# Altium PCB SwipingCard_PCB.PcbDoc
Units mil, origin at the board's own origin, x right, y up, seen from the top; angles counter-clockwise.
Board outline 100.31 x 100.31 mil, 2 copper layers (Top Layer, Bottom Layer); 24 components, 18 nets, 156 pads, 0 vias.
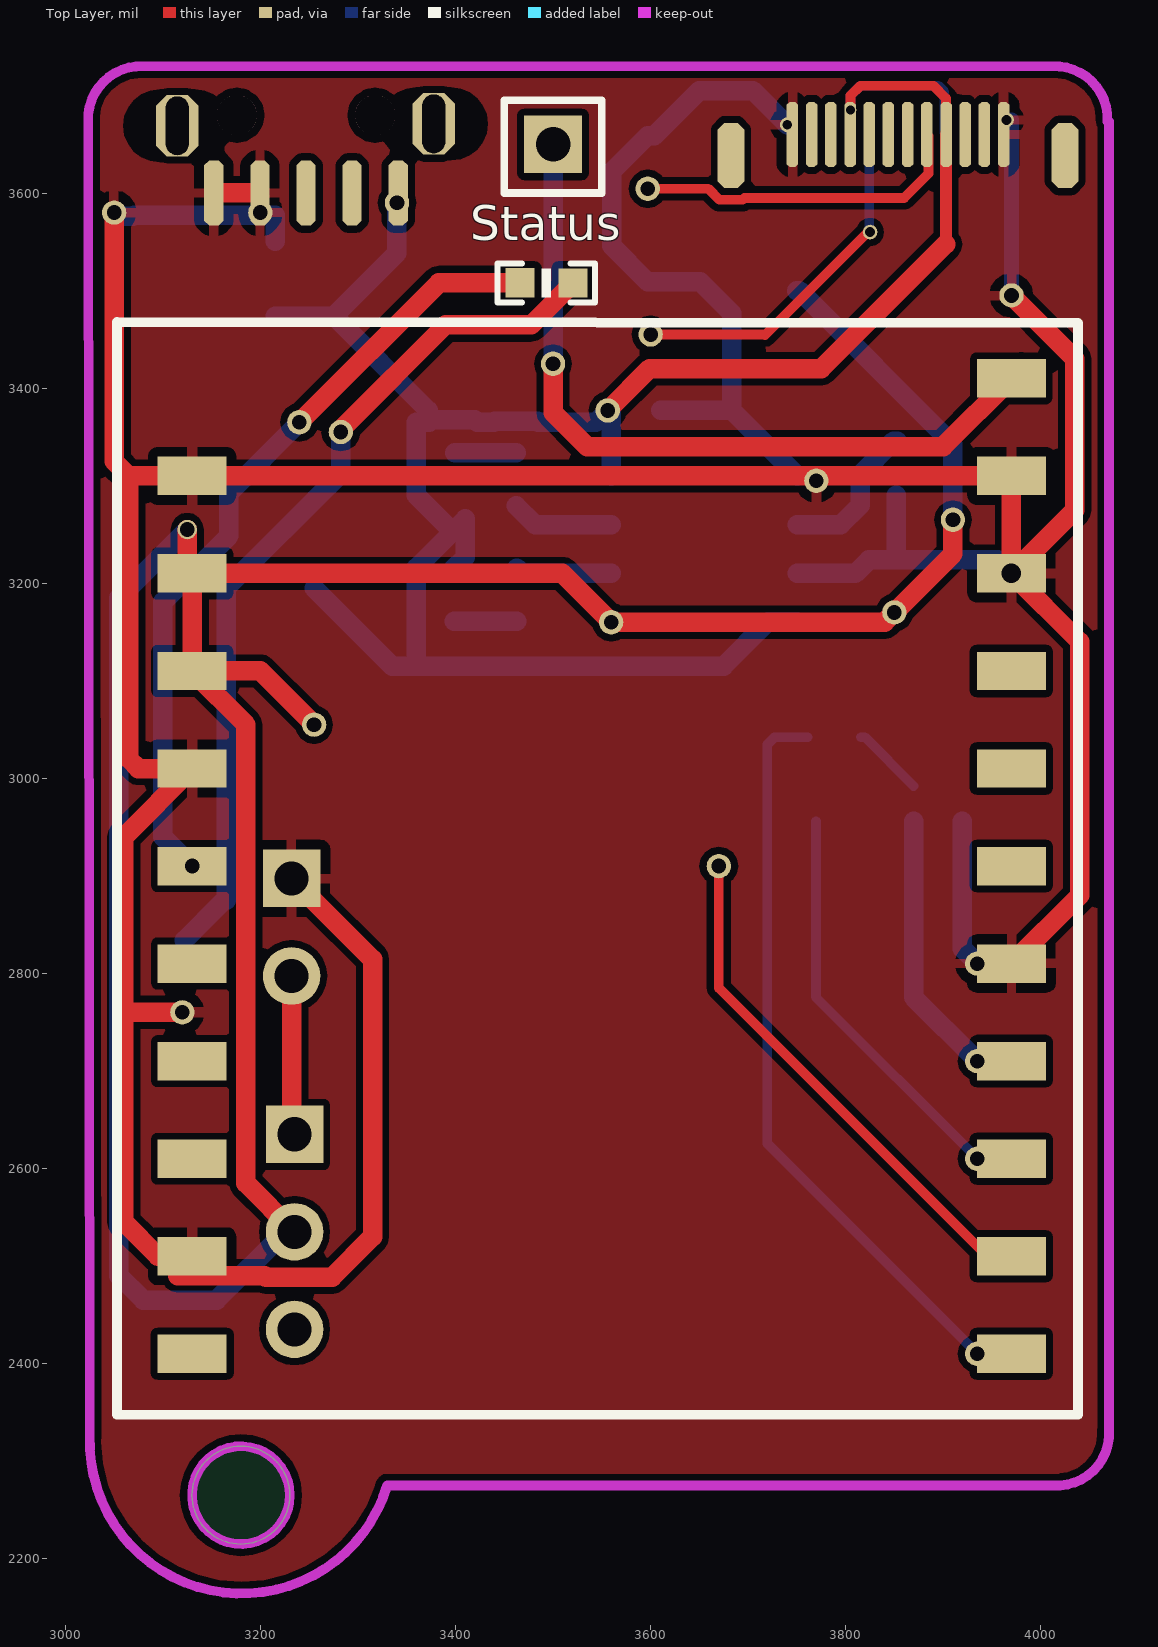
[diagram p0: Top Layer view]
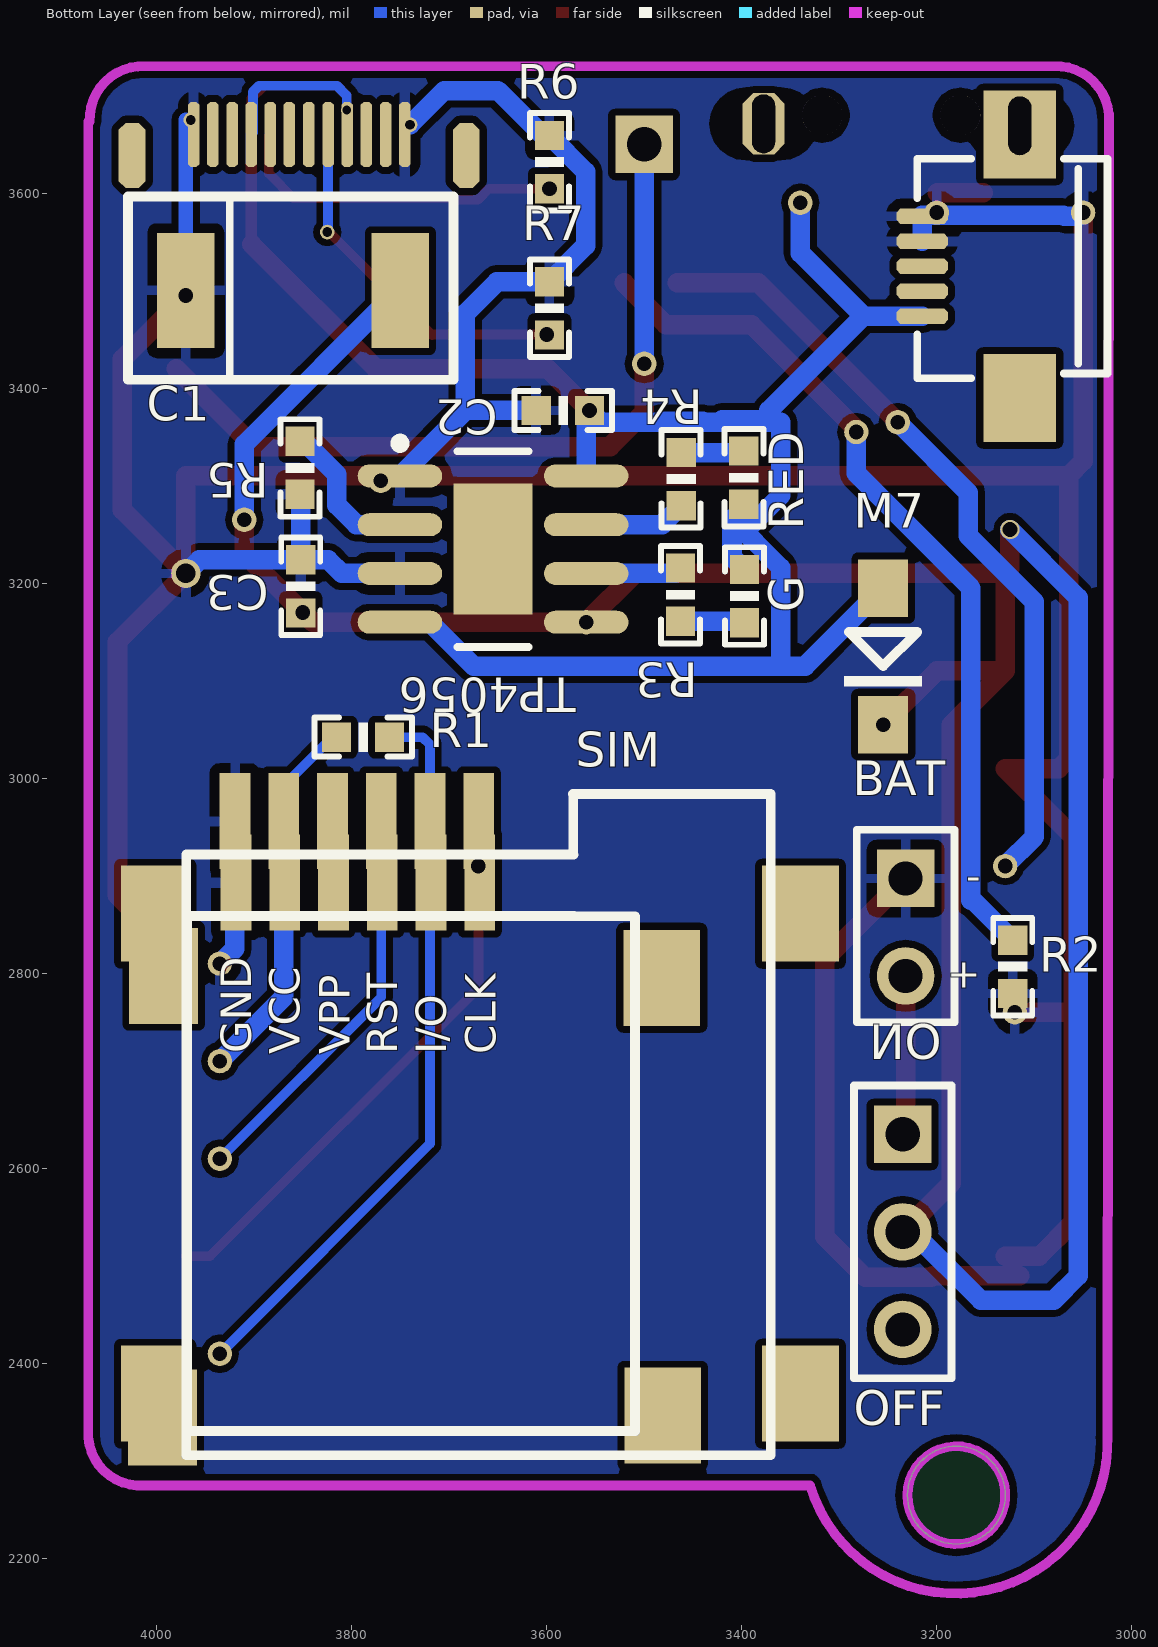
[diagram p1: Bottom Layer view, seen from below]

## Layer stack, top to bottom
Top Solder: solder mask 0.4, Solder Resist, Dk 3.5
Top Layer: signal copper 1.4
Dielectric 1: dielectric 12.6, FR-4, Dk 4.8
Bottom Layer: signal copper 1.4
Bottom Solder: solder mask 0.4, Solder Resist, Dk 3.5

## Board outline
3129.84,2265 cw(c3180,2265) 3180,2315.16 cw(c3180,2265) 3230.16,2265 cw(c3180,2265) 3180,2214.84 cw(c3180,2265)

## Design rules (kind name [scope] priority, off if disabled: settings)
Clearance [All] p1: gap=7
HoleToHoleClearance [All] p1: gap=1 allowstackedmicrovias=TRUE
MinimumSolderMaskSliver [All] p1: minsoldermaskwidth=0
PolygonConnect [All] p1: connectstyle=Relief reliefconductorwidth=10 reliefentries=4 polygonreliefangle="90 Angle" airgapwidth=10
RoutingVias [All] p1: holewidth=28 width=50 viastyle="Through Hole" minholewidth=28 minwidth=50 maxholewidth=28 maxwidth=50
SilkToSilkClearance [All] p1: silktosilkclearance=0
SilkToSolderMaskClearance [IsPad] p1: minsilkscreentomaskgap=0 clearancetoexposedcopper=TRUE
SolderMaskExpansion [All] p1: expansion=4
Width [All] p1: maxlimit=30 minlimit=8 preferedwidth=10
26 further rules are at their usual default settings.

## Classes and differential pairs
component class SwipingCard: *9 *14 *21 BAT C1 C2 C3 J1 M7 R1 R2 R3 R4 R5 R6 R7 TP4056

## Components (designator, comment, footprint, x,y, rotation, side; value= is the part's Value field where it differs from the comment)
*1 "RF" harder1x1 3690,3655 r0 top
*3 "M590E" M590E 2670,3010 r0 top
BAT "BAT" HEADER1*2 3230,2735 r270 bottom
C1 "470uF" 1206 3855,3500 r0 bottom
C2 "10uF" 0603 3930,3320 r0 bottom
C3 "10uF" 0603 3795,2850 r270 bottom
G "LED" 0603 3340,2840 r270 bottom (schematic designator LED2)
J1 "USB_M" USB_MICRO 3115,3525 r90 bottom
J2 "USB_M" micro 5250,4115 r180 top
M7 "M7" DIODE_SOP 3325,2795 r270 bottom
nanoSIM "SIM" nanoSIM 3665,2570 r180 bottom
OFF "power" HARDER1*3 3235,2325 r270 bottom (schematic designator KEY)
R1 "4.7k" 0603 4135,2985 r0 bottom
R2 "2K" 0603 3065,2460 r270 bottom
R3 "1.5k" 0603 3520,3535 r90 bottom
R4 "1.5k" 0603 3405,2960 r270 bottom
R5 "1.2k" 0603 3910,3665 r90 bottom
R6 "10K" 0603 3540,3285 r270 bottom
R7 "10k" 0603 3540,3135 r270 bottom
RED "LED" 0603 3455,3655 r90 bottom (schematic designator LED3)
SIM "SIM" microSIM 3690,2635 r180 bottom
Status "LED" 0603 3840,3565 r0 top (schematic designator LED1)
TP4056 "TP4056" TP4056 3655,3215 r180 bottom
TYPE-C "TYPE-C" TYPE-C 3490,3695 r180 top

## Footprints (in the part's own frame and the unit in brackets; to place one, negate y for a bottom-side part, rotate by r counter-clockwise, add the part's x,y. Pads: shape width x height; smd on the part's side, far side on the other; paste and mask are expansions set on the pad)
0603 [mil]
  rect 30x30 smd: 1(-373.93,-57.09) 2(-319.43,-57.15)
  silkscreen extent -397,-77 -297,-37
1206 [mm] "钽电容"
  rect 1.5x3 smd: 1(-2.667,0) 2(2.921,0)
  silkscreen extent -4.05,-2.47 4.43,2.32
DIODE_SOP [mm]
  rect 1.5x1.3 smd: 1(-10.16,1.778) 2(-6.604,1.778)
  silkscreen extent -9.02,0.76 -7.6,2.79
HARDER1*3 [mil]
  rect 59.06x59.06 hole 35: 1(-310,0)
  round 59.06 hole 35: 2(-210,0) 3(-110,0)
  silkscreen extent -360,-50 -60,50
harder1x1 [mm]
  rect 1.5x1.5 hole 0.9: 1(-4.826,-0.127)
  silkscreen extent -6.1,-1.4 -3.56,1.02
HEADER1*2 [mm]
  rect 1.5x1.5 hole 0.889: 1(-4.124,-0.05)
  round 1.5 hole 0.889: 2(-1.584,-0.05)
  silkscreen extent -5.39,-1.32 -0.38,1.22
M590E [mm]
  rect 1.8x1 smd: 1(11.684,7.62) 2(11.684,5.08) 3(11.684,2.54) 4(11.684,0) 5(11.684,-2.54) 6(11.684,-5.08) 7(11.684,-7.62) 8(11.684,-10.16) 9(11.684,-12.7) 10(11.684,-15.24) 11(33.02,-15.24) 12(33.02,-12.7) 13(33.02,-10.16) 14(33.02,-7.62) 15(33.02,-5.08) 16(33.02,-2.54) 17(33.02,0) 18(33.02,2.54) 19(33.02,5.08) 20(33.02,7.62) 21(33.02,10.16)
  silkscreen extent 9.72,-16.83 34.75,11.63
micro [mm]
  oct 0.5x1.7 smd: 1(48.483,13.079) 2(49.683,13.079) 3(50.883,13.079) 4(52.083,13.079) 5(53.283,13.079)
  oct 1.1x1.6 hole 1.524 slot 0.6 at 0 deg: ""(47.558,11.279) ""(54.233,11.329)
  round 1.041 hole 1.05: ""(49.083,11.054) ""(52.683,11.054)
microSIM [mm]
  rect 1.8x2.5 smd: 0(-7.902,-6.756) 0(-7.902,5.744)
  rect 2x2.5 smd: 0(8.898,-6.756) 0(8.898,5.744)
  rect 0.8x2.5 smd: 1(-5.832,8.154) 2(-4.562,8.154) 3(-3.292,8.154) 4(-2.022,8.154) 5(-0.752,8.154) 6(0.518,8.154)
  silkscreen extent -7.1,-8.36 8.12,8.86, body extent -7.57,-8.54 8.83,8.66, height 1.35
nanoSIM [mm]
  rect 1.8x2.5 smd: 0(-8.35,-5.725) 0(-8.325,5.775)
  rect 2x2.5 smd: 0(4.65,5.725) 0(4.675,-5.675)
  rect 0.8x2.5 smd: 1(-6.442,8.205) 2(-5.172,8.205) 3(-3.902,8.205) 4(-2.632,8.205) 5(-1.362,8.205) 6(-0.092,8.205)
  silkscreen extent -7.71,-6.07 3.95,7.33
TP4056 [mm]
  oval 2.2x0.6 smd: 1(-2.425,2.413) 2(-2.425,1.143) 3(-2.425,-0.127) 4(-2.425,-1.397) 5(2.425,-1.397) 6(2.425,-0.127) 7(2.425,1.143) 8(2.425,2.413)
  rect 2.05x3.41 smd: 9(0,0.508)
  silkscreen extent -2.55,-2.04 0.93,3.39, body extent -2,-2.04 2,3.06, height 1.75
TYPE-C [mm]
  oct 0.3x1.7 smd: A1(-11.988,0.886) A2(-11.488,0.886) A3(-10.988,0.886) A4(-10.488,0.886) A5(-9.988,0.886) A6(-9.488,0.886) A7(-8.988,0.886) A8(-8.488,0.886) A9(-7.988,0.886) A10(-7.488,0.886) A11(-6.988,0.886) A12(-6.488,0.886)
  oct 0.3x1.7 smd far side: B1(-6.488,0.886) B2(-6.988,0.886) B3(-7.488,0.886) B4(-7.988,0.886) B5(-8.488,0.886) B6(-8.988,0.886) B7(-9.5,0.889) B8(-9.988,0.886) B9(-10.488,0.886) B10(-10.988,0.886) B11(-11.488,0.886) B12(-11.988,0.886)
  oct 0.7x1.7 smd: ""(-13.588,1.436) ""(-4.888,1.436)
  oct 0.7x1.7 smd far side: ""(-13.588,1.436) ""(-4.888,1.436)
USB_MICRO [mm] "USB方孔"
  oct 0.4x1.35 smd: 1(-1.3,2.54) 2(-0.65,2.54) 3(0,2.54) 4(0.65,2.54) 5(1.3,2.54)
  rect 2.286x1.9 smd: 6(3.429,0) 7(-3.429,0)
  silkscreen extent -2.92,-2.29 2.79,2.67

## Part data
*1: library part harder1x1
C1: library part C
C2 C3: library part cap
J1 J2: "MicroUSB接口"
R1 R2 R3 R4 R5 R6 R7: library part R

## Free pads (board coordinates)
  round 25 hole 15: 7(3050,3580) 7(3120,2760) 7(3130,2910) 7(3200,3580) 7(3240,3365) 7(3255,3055) 7(3282.5,3355) 7(3340,3590) 7(3500,3425) 7(3556.07,3377.09) 7(3559.53,3160) 7(3597.15,3604.43) 7(3600,3455) 7(3670,2910) 7(3770,3305) 7(3850,3170) 7(3910,3265) 7(3935,2410) 7(3935,2610) 7(3935,2710) 7(3935,2810) 7(3970,3495)
  round 20 hole 15: 7(3125,3255)
  round 15 hole 10: 7(3740,3670) 7(3825,3560) 7(3965,3675)
  round 12 hole 9: 7(3805,3685)
  round 30 hole 20: 7(3970,3210)

## Nets (pads, with @x,y where several pads share a name; then routed paths per layer and width w, separated by ;. In a path a pad name is that pad's centre, name@x,y a point inside that pad or via, vN(x,y) a via of type N, cw(c..) or ccw(c..) an arc to the next point about the centre after c; other vN are vias at no path point)
BAT+: *3.2 *3.3 C1.1 C3.2 M7.2 OFF.2 pad.7@3125,3255 pad.7@3255,3055 pad.7@3559.53,3160 pad.7@3850,3170 pad.7@3910,3265 TP4056.5 | length 3084.1
  Top Layer w20: pad.7@3125,3255 3125,3215 *3.2 ; OFF.2 3185,2585 3185,3055 *3.3 ; pad.7@3255,3055 3200,3110 *3.3 ; pad.7@3910,3265 3910,3230 3850,3170 3840,3160 3559.53,3160 3509.53,3210 *3.2 ; *3.3 *3.2
  Bottom Layer w20: pad.7@3125,3255 3055,3185 3055,2490 3080,2465 3155,2465 OFF.2@3225,2535 ; C1.1 3752.46,3500 3910,3342.46 pad.7@3910,3265
BAT_IN: BAT.2 OFF.1 | length 165.2
  Top Layer w20: OFF.1@3225,2635 3231.97,2641.97 BAT.2
GND: *3.1 *3.4 *3.9 *3.15 *3.19 *3.20 BAT.1 C1.2 C2.2 C3.1 J1.4 J1.5 J2.4 J2.5 nanoSIM.1 pad.7@3050,3580 pad.7@3120,2760 pad.7@3200,3580 pad.7@3740,3670 pad.7@3770,3305 pad.7@3935,2810 pad.7@3965,3675 pad.7@3970,3210 pad.7@3970,3495 R2.2 R5.1 R6.1 R7.1 SIM.1 TP4056.1 TP4056.3 TYPE-C.A1 TYPE-C.A12 TYPE-C.B1 TYPE-C.B12 | length 5279.9
  Top Layer w20: pad.7@3050,3580 3050,3325 3065,3310 ; 3115,2490 3204.2,2490 3205.73,2488.47 3273.47,2488.47 3315,2530 3315,2814.33 BAT.1 ; pad.7@3120,2760 3060,2760 ; *3.9 3095,2510 3060,2545 3060,2760 ; J2.5 J2.4 ; *3.15 4040,2880 4040,3140 *3.19 ; pad.7@3970,3495 4035,3430 4035,3275 *3.19 ; 3060,2760 3060,2940 *3.4 3075,3010 3065,3020 3065,3310 ; 3065,3310 *3.1 *3.20 *3.19
  Bottom Layer w15: C1.2 pad.7@3970,3675
  Bottom Layer w20: pad.7@3053.82,3576.18 3069.3,3576.18 3070.56,3577.43 3215,3577.43 J1.5 J1.4 ; C2.2 3683.32,3377.15 ; pad.7@3740,3670 3705,3705 3650,3705 3603.93,3658.93 R6.1 3560,3621.84 3560,3546.02 R7.1 3651.07,3508.93 3683.32,3476.68 3683.32,3377.15 ; TP4056.3 3810,3210 3823.93,3223.93 C3.1 ; TP4056.1 3683.32,3377.15 ; R5.1@3852.09,3290.24 C3.1 ; SIM.1 3919.61,2825.39 pad.7@3935,2810 ; pad.7@3970,3210 3956.07,3223.93 C3.1
LIGHT: *3.5 pad.7@3130,2910 pad.7@3240,3365 Status.1 | length 810.7
  Top Layer w20: pad.7@3240,3365 3382.91,3507.91 Status.1
  Bottom Layer w20: pad.7@3130,2910 3100,2940 3100,3180.84 3167.59,3248.43 3167.59,3292.59 pad.7@3240,3365
Net*1_1: *1.1 *3.21 pad.7@3500,3425 | length 802.6
  Top Layer w20: pad.7@3500,3425 3500,3375 3535,3340 3900,3340 *3.21 *3.21@3980,3420
  Bottom Layer w20: pad.7@3500,3425 *1.1
NetLED1_2: pad.7@3282.5,3355 R2.1 Status.2 | length 889.2
  Top Layer w20: pad.7@3282.5,3355 3285,3360 3390,3465 3477.72,3465 Status.2
  Bottom Layer w20: R2.1 3163.16,2875 ; 3165,2875 3165,3195 3282.5,3312.5 pad.7@3282.5,3355
NetLED2_2: G.2 R3.1 | length 64.1
  Bottom Layer w20: G.2@3398.79,3161.07 R3.1
NetLED3_2: R4.1 RED.2 | length 62.6
  Bottom Layer w20: RED.2@3399.49,3333.93 R4.1
NetR3_2: R3.2 TP4056.6 | length 99
  Bottom Layer w20: R3.2 3468.42,3210 TP4056.6
NetR4_2: R4.2 TP4056.7 | length 105.4
  Bottom Layer w20: R4.2 3481.58,3260 TP4056.7
NetR5_2: R5.2 TP4056.2 | length 156.2
  Bottom Layer w20: TP4056.2 3795,3260 3815,3280 3815,3311.44 3849.13,3345.57 R5.2
NetR6_2: pad.7@3597.15,3604.43 R6.2 TYPE-C.A5 | length 342.2
  Top Layer w10: pad.7@3597.15,3604.43 3659.15,3604.43 3670.58,3593 3694.3,3593 3696.3,3595 3860,3595 3884.91,3619.91 TYPE-C.A5@3884.91,3658.43
NetR7_2: pad.7@3600,3455 pad.7@3825,3560 R7.2 TYPE-C.B5 | length 368
  Top Layer w10: pad.7@3600,3455 3716.83,3455 ; 3717.4,3454.43 pad.7@3823.99,3561.01
  Bottom Layer w10: TYPE-C.B5 3824.17,3560.83 pad.7@3825,3560
SIMCLK: *3.12 nanoSIM.6 pad.7@3670,2910 SIM.6 | length 538.9
  Top Layer w10: pad.7@3670,2910 3670,2785 3945,2510 *3.12
SIMIO: *3.11 nanoSIM.5 pad.7@3935,2410 R1.1 SIM.5 | length 758.4
  Bottom Layer w10: R1.1 3727.09,3042.09 3719.61,3034.61 SIM.5 3719.61,2625.39 pad.7@3935,2410
SIMRST: *3.13 nanoSIM.4 pad.7@3935,2610 SIM.4 | length 414.5
  Bottom Layer w10: SIM.4 3769.61,2775.39 pad.7@3935,2610
SIMVCC: *3.14 nanoSIM.2 pad.7@3935,2710 R1.2 SIM.2 | length 347.8
  Bottom Layer w10: R1.2 3819.65,3042.15 SIM.2@3869.61,2992.2
  Bottom Layer w20: SIM.2 3869.61,2775.39 pad.7@3935,2710
VCC: C2.1 G.1 J1.1 J2.1 M7.1 pad.7@3340,3590 pad.7@3556.07,3377.09 pad.7@3805,3685 RED.1 TP4056.4 TP4056.8 TYPE-C.A4 TYPE-C.A9 TYPE-C.B4 TYPE-C.B9 | length 2367.8
  Top Layer w10: pad.7@3805,3685 3805,3700 3815,3710 3890,3710 3902.91,3697.09 TYPE-C.A4
  Top Layer w12: 3902.91,3547.09 TYPE-C.A4
  Top Layer w20: pad.7@3556.07,3377.09 3598.98,3420 3775,3420 3902.5,3547.5
  Bottom Layer w10: pad.7@3805,3685 3805,3700 3815,3710 3895,3710 3901.13,3703.87 3901.13,3661.9 TYPE-C.B9
  Bottom Layer w20: J1.1 3275.35,3473.82 ; M7.1 3335,3115 3360,3115 ; pad.7@3340,3590 3340,3538.46 3275.35,3473.82 ; 3372.09,3377.09 3275.35,3473.82 ; G.1 3410,3226.84 3410,3265.83 3360,3215.83 3360,3115 ; 3397.09,3252.91 3360,3290 3360,3365 3373.24,3365 3375.81,3367.57 3419.89,3367.57 3422.46,3365 3439.12,3365 3440.05,3365.93 3484.13,3365.93 3485.06,3365 3543.98,3365 C2.1 3559.53,3373.63 TP4056.8 ; TP4056.4 3720,3160 3675,3115 3360,3115
pads on no net: *3.6 *3.7 *3.8 *3.10 *3.16 *3.17 *3.18 J1.2 J1.3 J1.6 J1.7 J2. J2.2 J2.3 nanoSIM.0 nanoSIM.3 OFF.3 SIM.0 SIM.3 TP4056.9 TYPE-C. TYPE-C.A2 TYPE-C.A3 TYPE-C.A6 TYPE-C.A7 TYPE-C.A8 TYPE-C.A10 TYPE-C.A11 TYPE-C.B2 TYPE-C.B3 TYPE-C.B6 TYPE-C.B7 TYPE-C.B8 TYPE-C.B10 TYPE-C.B11

## Polygon pours and split planes (outlines as drawn)
GND on Bottom Layer "Top Layer-No Net" (solid, remove dead copper, pour order 22): 2535,3940 2680,3795 2680,1965 4865,1965 4640,2190 4640,3895
GND on Top Layer "Top Layer-No Net" (solid, remove dead copper, pour order 26): 2740,3995 2805,3930 4470,3930 4470,2035 4365,1930 2950,1930

## Keep-outs
Keep-Out Layer:
  circle w10: c3180,2265 r50.16
  lines w10: 3023.42,3673.42 cw(c3077.45,3675.97) 3080,3730 4011.84,3730 cw(c4014.39,3675.97) 4068.42,3673.42 ; 3023.48,3673.42 3025.07,2325.75 ccw(c3180.81,2320.04) 3330,2275 4020,2275 ccw(c4016.71,2328.29) 4070,2331.58 4070,3673.42

## Silkscreen, mask and mechanical layers (free items; w line width, h text height)
Bottom Overlay:
  text "-" at 3155,2885 h30
  text "+" at 3155,2785 h30
  text "ON" at 3195,2700 h60

## Text inside footprints (layer, text, board x,y; h text height)
nanoSIM: Bottom Overlay "I/O" at 3703,2717 h31.5 r270; Bottom Overlay "VPP" at 3802,2717 h31.5 r270; Bottom Overlay "GND" at 3903,2718 h31.5 r270; Bottom Overlay "CLK" at 3652,2717 h31.5 r270; Bottom Overlay "RST" at 3753,2717 h31.5 r270; Bottom Overlay "VCC" at 3853,2717 h31.5 r270